# Altium PCB Car_reader_pcb.PcbDoc
Units mm, origin at the board's own origin, x right, y up, seen from the top; angles counter-clockwise.
Board outline 152.4 x 101.6 mm, 2 copper layers (Top Layer, Bottom Layer); 64 components, 47 nets, 231 pads, 0 vias.
Unrouted connection lines stored in the file: 122.
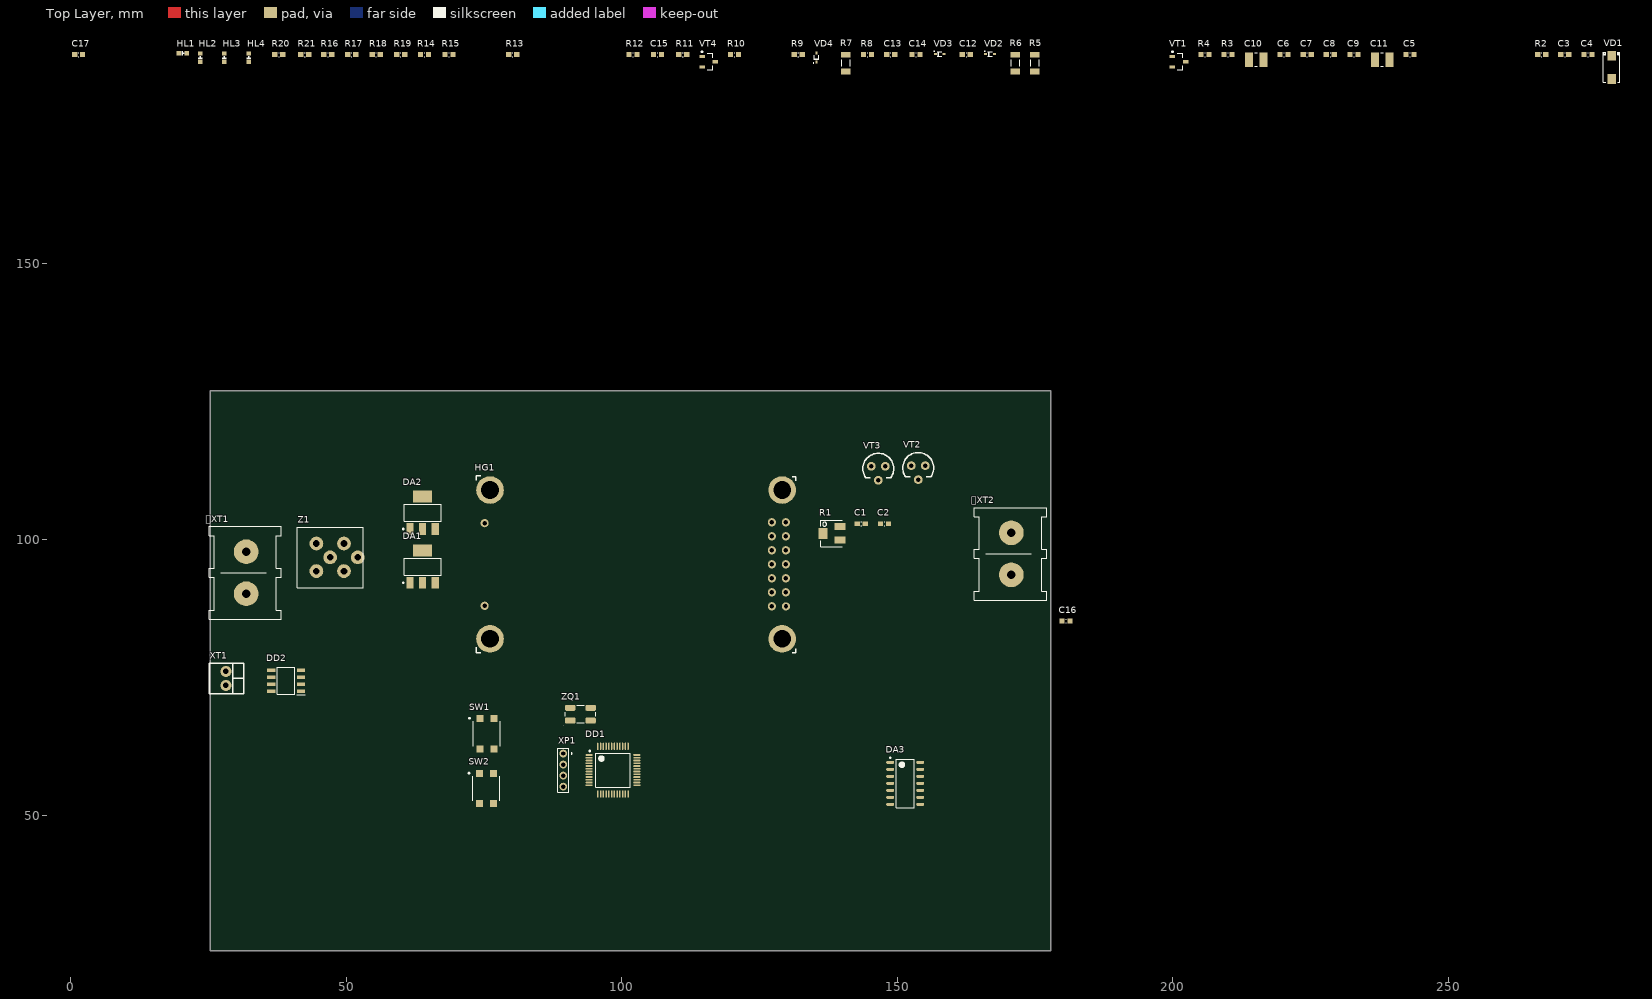
[diagram p0: Top Layer view]
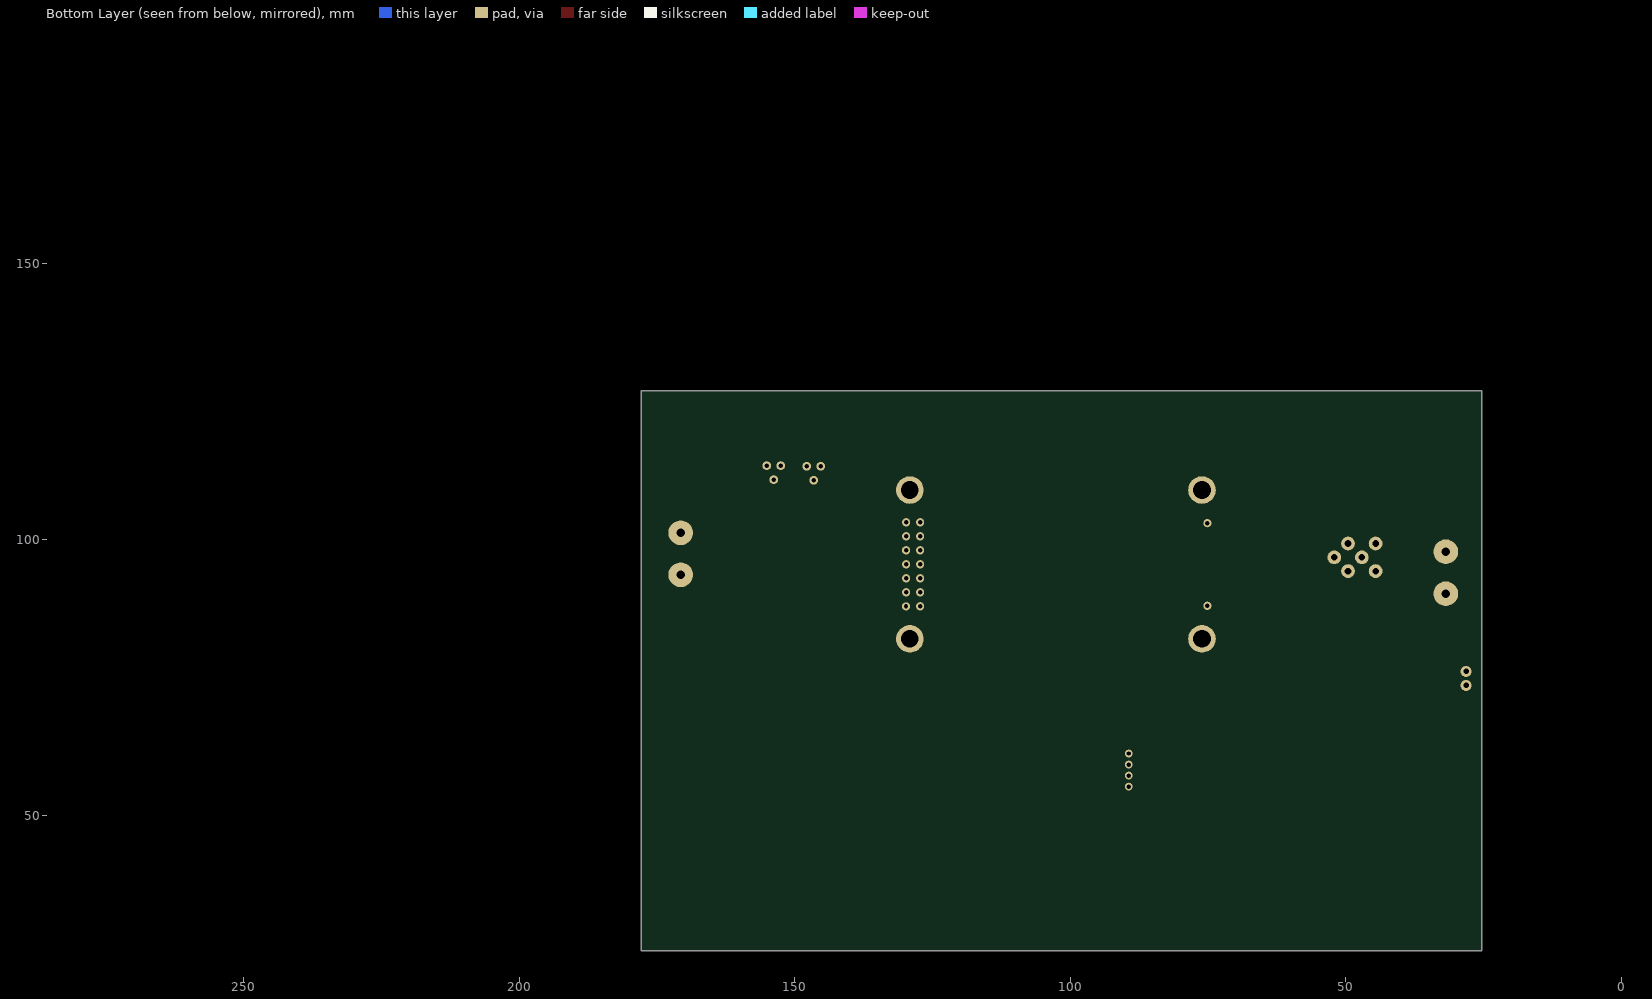
[diagram p1: Bottom Layer view, seen from below]

## Layer stack, top to bottom
Top Solder: solder mask 0.0102, Solder Resist, Dk 3.5
Top Layer: signal copper 0.0356
Dielectric 1: dielectric 0.32, FR-4, Dk 4.8
Bottom Layer: signal copper 0.0356
Bottom Solder: solder mask 0.0102, Solder Resist, Dk 3.5

## Board outline
25.4,25.4 177.8,25.4 177.8,127 25.4,127

## Design rules (kind name [scope] priority, off if disabled: settings)
Clearance [All] p1: gap=0.254 ignorepadtopadclearanceinfootprint=FALSE except(0: Arc-Hole Track-Hole SMDPad-Hole THPad-Hole Via-Hole Fill-Hole Poly-Hole Region-Hole Text-Hole)
PolygonConnect [All] p1: connectstyle=Relief reliefconductorwidth=0.254 reliefentries=4 polygonreliefangle="90 Angle" airgapwidth=0.254
RoutingVias [All] p1: holewidth=0.711 width=1.27 viastyle="Through Hole" minholewidth=0.711 minwidth=1.27 maxholewidth=0.711 maxwidth=1.27
SolderMaskExpansion [All] p1: expansion=0.102 istentingtop=FALSE
Width [All] p1: maxlimit=0.254 minlimit=0.254 preferedwidth=0.254
30 further rules are at their usual default settings.

## Components (designator, comment, footprint, x,y, rotation, side; value= is the part's Value field where it differs from the comment)
XT1 "DG25C-B-02P" DG25C-B-02P 31.877,90.17 r90 top (schematic designator XT1)
XT2 "DG25C-B-02P" DG25C-B-02P 170.688,93.599 r90 top (schematic designator XT2)
C1 "0,1 мк" C_0603 143.469,102.87 r0 top value=0.1µF
C2 "0,1 мк" C_0603 147.66,102.87 r0 top value=0.1µF
C3 "0,1 мк" C_0603 271.104,187.96 r0 top value=0.1µF
C4 "0,1 мк" C_0603 275.295,187.96 r0 top value=0.1µF
C5 "0,1 мк" C_0603 243.037,187.96 r0 top value=0.1µF
C6 "0,1 мк" C_0603 220.177,187.96 r0 top value=0.1µF
C7 "0,1 мк" C_0603 224.368,187.96 r0 top value=0.1µF
C8 "0,1 мк" C_0603 228.559,187.96 r0 top value=0.1µF
C9 "0,1 мк" C_0603 232.877,187.96 r0 top value=0.1µF
C10 "22 мк" C_1210 215.097,187.071 r0 top
C11 "22 мк" C_1210 237.957,187.071 r0 top
C12 "0,001" C_0603 162.519,187.96 r0 top value=0.1µF
C13 "1000" C_0603 148.803,187.96 r0 top value=0.1µF
C14 "1000" C_0603 153.375,187.96 r0 top value=0.1µF
C15 "0,1 мк" C_0603 106.512,187.96 r0 top value=0.1µF
C16 "0,1 мк" C_0603 180.594,85.217 r0 top value=0.1µF
C17 "0,1 мк" C_0603 1.483,187.96 r0 top value=0.1µF
DA1 "LM1117MPX-5.0" sot223 63.881,95.082 r90 top
DA2 "LM1117GS-2.5" SOT223 63.881,104.861 r90 top
DA3 "AD8608ARZ" SO-14 151.442,55.753 r0 top
DD1 "STM32F030C8T6" LQFP48 98.425,58.166 r0 top
DD2 "MCP2551T-I_SN" SOIC127P600X175-8N 39.116,74.422 r180 top
HG1 "ERM802-3" ERM802 131.622,111.406 r180 top
HL1 "BL-HGK36G" LED_0603_GREEN 20.406,188.214 r0 top
HL2 "BL-HGK36G" LED_0603_GREEN 23.581,187.452 r90 top
HL3 "BL-HKC36A-AV" LED_0603_GREEN 27.899,187.452 r90 top
HL4 "BL-HJD36A-AV" LED_0603_RED 32.344,187.452 r90 top
R1 "3214W-1-103E" "3214W Bourns" 138.008,101.092 r0 top
R2 "100k" R_0603 266.913,187.96 r0 top value=82
R3 "470" R_0603 210.017,187.96 r0 top value=82
R4 "1 кОм" R_0603 205.826,187.96 r0 top
R5 "10" R_1206 174.965,186.436 r90 top
R6 "10" R_1206 171.409,186.436 r90 top
R7 "10" R_1206 140.675,186.436 r90 top
R8 "820к" R_0603 144.612,187.96 r0 top value=82
R9 "22k" R_0603 132.039,187.96 r0 top value=82
R10 "100" R_0603 120.482,187.96 r0 top value=82
R11 "12K" R_0603 111.084,187.96 r0 top value=82
R12 "10k" R_0603 102.067,187.96 r0 top value=82
R13 "120" R_0603 80.223,187.96 r0 top value="1 кОм"
R14 "10 кОм" R_0603 64.221,187.96 r0 top
R15 "10 кОм" R_0603 68.666,187.96 r0 top
R16 "470" R_0603 46.695,187.96 r0 top
R17 "470" R_0603 51.013,187.96 r0 top
R18 "470" R_0603 55.458,187.96 r0 top
R19 "470" R_0603 59.903,187.96 r0 top
R20 "1кОм" R_0603 37.805,187.96 r0 top value="10 кОм"
R21 "1кОм" R_0603 42.504,187.96 r0 top value="10 кОм"
SW1 "7914G-1-000E" 7914G 75.524,64.77 r0 top
SW2 "7914G-1-000E" 7914G 75.438,54.82 r0 top
VD1 "SMAJ12A-TR" DO-214AC 279.613,185.674 r90 top
VD2 "1N4148WT" SOD-523F 166.837,188.087 r0 top
VD3 "1N4148WT" SOD-523F 157.693,188.087 r0 top
VD4 "1N4148WT" SOD-523F 135.341,187.452 r90 top
VT1 "BC847" SOT23 201.127,186.69 r0 top
VT2 "BC547" КТ-26 152.527,113.411 r0 top
VT3 "BC557" КТ-26 145.288,113.284 r0 top
VT4 "BC847" SOT23 115.783,186.69 r0 top
XP1 "PLS2-4" PLS2-4 89.408,61.182 r270 top
XT1 "DG308-2.54-02P" DG308-2.54-02P 28.204,73.533 r90 top
Z1 "BNX016-01" BNX01 47.117,96.774 r0 top
ZQ1 "8 МГц" "MJ CRYSTAL" 90.678,67.169 r0 top

## Footprints (in the part's own frame and the unit in brackets; to place one, negate y for a bottom-side part, rotate by r counter-clockwise, add the part's x,y. Pads: shape width x height; smd on the part's side, far side on the other; paste and mask are expansions set on the pad)
"3214W Bourns" [mm]
  rect 2x1.3 smd: 1(1.6,-1.2) 3(1.6,1.3)
  rect 1.6x2 smd: 2(-1.5,0)
  silkscreen extent -1.9,-2.4 2,2.4, body extent -1.87,-2.4 2.07,2.4, height 5.5
7914G [mm]
  rect 1.27x1.27 smd paste+0 mask+0: 1(-1.27,-2.75) 1(-1.27,2.75) 2(1.27,-2.75) 2(1.27,2.75)
  silkscreen extent -3.25,-2.25 2.46,2.94, body extent -2.46,-3.1 2.46,3.1, height 4.54
BNX01 [mm]
  round 2.5 hole 1.2: 1(2.5,-2.5) 2(2.5,2.5) 3(-2.5,2.5) 4(-2.5,-2.5) 4(0,0) 4(5,0)
  silkscreen extent -6,-5.5 6,5.5, body extent -6,-5.5 6,5.5, height 8
C_0603 [mm] "Chip Resistor, 2-Leads, Body 1.60x0.80mm, IPC Medium Density"
  rect 0.95x0.9 smd: 1(-0.725,0) 2(0.725,0)
  silkscreen extent -0.05,-0.35 0.05,0.35, body extent -0.8,-0.4 0.8,0.4, height 0.8
C_1210 [mm] "Chip Capacitor, 2-Leads, Body 3.20x2.50mm, IPC Medium Density"
  rect 1.45x2.65 smd: 1(-1.325,0) 2(1.325,0)
  silkscreen extent -0.2,-1.22 0.2,1.23, body extent -1.6,-1.25 1.6,1.25, height 2.5
DG25C-B-02P [mm]
  round 4.5 hole 1.6: 1(0,0) 2(7.62,0)
  silkscreen extent -4.6,-6.4 12.2,6.7, body extent -4.57,-6.48 12.17,6.75, height 15
DG308-2.54-02P [mm]
  round 2 hole 1: 1(0,0) 2(2.54,0)
  silkscreen extent -1.5,-3.2 4,3, body extent -1.65,-3 4.15,3.03, height 7.93
DO-214AC [mm]
  rect 1.8x1.5 smd: 1(-2.1,0) 2(2.1,0)
  silkscreen extent -2.7,-1.5 2.7,1.5, body extent -2.5,-1.35 2.5,1.35, height 2.25
ERM802 [mm]
  round 5 hole 3.2: 0(2.508,29.428) 0(2.508,2.428) 0(55.508,2.428) 0(55.508,29.428)
  round 1.5 hole 0.8: 1(4.368,8.282) 2(1.828,8.282) 3(4.368,10.822) 4(1.828,10.822) 5(4.368,13.362) 6(1.821,13.362) 7(4.368,15.902) 8(1.828,15.902) 9(4.368,18.442) 10(1.828,18.442) 11(4.368,20.982) 12(1.828,20.982) 13(4.368,23.522) 14(1.814,23.535) 15(56.488,23.428) 16(56.488,8.428)
  silkscreen extent 0.01,-0.15 58.02,31.9, body extent -0.47,-0.37 58.47,32.16, height 18.2
LED_0603_GREEN [mm]
  rect 0.8x0.8 smd: 1(-0.775,0) 2(0.725,0)
  silkscreen extent -0.3,-0.4 0.25,0.4, body extent -0.8,-0.4 0.8,0.4, height 0.6
LED_0603_RED [mm]
  rect 0.8x0.8 smd: 1(-0.775,0) 2(0.725,0)
  silkscreen extent -0.3,-0.4 0.25,0.4, body extent -0.8,-0.4 0.8,0.4, height 0.65
LQFP48 [mm] "TSQFP, 48-Leads, Body 7,00x7,00mm, Pitch 0,50mm, IPC Medium Density"
  oval 1.3x0.3 smd: 1(-4.325,2.75) 2(-4.325,2.25) 3(-4.325,1.75) 4(-4.325,1.25) 5(-4.325,0.75) 6(-4.325,0.25) 7(-4.325,-0.25) 8(-4.325,-0.75) 9(-4.325,-1.25) 10(-4.325,-1.75) 11(-4.325,-2.25) 12(-4.325,-2.75) 25(4.325,-2.75) 26(4.325,-2.25) 27(4.325,-1.75) 28(4.325,-1.25) 29(4.325,-0.75) 30(4.325,-0.25) 31(4.325,0.25) 32(4.325,0.75) 33(4.325,1.25) 34(4.325,1.75) 35(4.325,2.25) 36(4.325,2.75)
  oval 0.3x1.3 smd: 13(-2.75,-4.325) 14(-2.25,-4.325) 15(-1.75,-4.325) 16(-1.25,-4.325) 17(-0.75,-4.325) 18(-0.25,-4.325) 19(0.25,-4.325) 20(0.75,-4.325) 21(1.25,-4.325) 22(1.75,-4.325) 23(2.25,-4.325) 24(2.75,-4.325) 37(2.75,4.325) 38(2.25,4.325) 39(1.75,4.325) 40(1.25,4.325) 41(0.75,4.325) 42(0.25,4.325) 43(-0.25,4.325) 44(-0.75,4.325) 45(-1.25,4.325) 46(-1.75,4.325) 47(-2.25,4.325) 48(-2.75,4.325)
  silkscreen extent -4.35,-3.1 3.1,3.57, body extent -4.53,-4.53 4.47,4.47, height 1.5
"MJ CRYSTAL" [mm]
  rrect50% 1.9x1.1 smd: 1(0,0) 2(3.7,0) 3(3.7,2.3) 4(0,2.3)
  silkscreen extent -0.9,-0.4 4.6,2.8, body extent -0.67,-0.46 4.33,2.74, height 1
PLS2-4 [mm]
  round 1.4 hole 0.8: 1(0,0) 2(2,0) 3(4,0) 4(6,0)
  silkscreen extent -1,-1 7,1.6, body extent -1,-1 7,1, height 6.1
R_0603 [mm] "Chip Resistor, 2-Leads, Body 1.60x0.80mm, IPC Medium Density"
  rect 0.95x0.9 smd: 1(-0.725,0) 2(0.725,0)
  silkscreen extent -0.05,-0.38 0.05,0.38, body extent -0.8,-0.45 0.75,0.4, height 0.45
R_1206 [mm] "Chip Capacitor, 2-Leads, Body 3,20x1,60mm, IPC Medium Density"
  rect 1.05x1.75 smd: 1(-1.5,0) 2(1.5,0)
  silkscreen extent -0.6,-0.77 0.6,0.77, body extent -1.68,-0.87 1.67,0.86, height 0.85
SO-14 [mm] "SOIC, 14-Leads, Body 8,65x3,90mm, Pitch 1,27mm, IPC Medium Density"
  oval 1.45x0.6 smd: 1(-2.725,3.81) 2(-2.725,2.54) 3(-2.725,1.27) 4(-2.725,0) 5(-2.725,-1.27) 6(-2.725,-2.54) 7(-2.725,-3.81) 8(2.725,-3.81) 9(2.725,-2.54) 10(2.725,-1.27) 11(2.725,0) 12(2.725,1.27) 13(2.725,2.54) 14(2.725,3.81)
  silkscreen extent -2.85,-4.4 1.6,4.78, body extent -2.99,-4.34 3,4.35, height 1.6
SOD-523F [mm] "SODFL, 2-Leads, Body 0.80x1.60mm, IPC Medium Density"
  rect 0.55x0.4 smd: 1(-0.8,0) 2(0.8,0)
  silkscreen extent -1.02,-0.42 0.4,0.55, body extent -0.8,-0.45 0.8,0.45, height 0.7
SOIC127P600X175-8N [mm]
  rect 1.525x0.65 smd: 1(-2.712,1.905) 2(-2.712,0.635) 3(-2.712,-0.635) 4(-2.712,-1.905) 5(2.712,-1.905) 6(2.712,-0.635) 7(2.712,0.635) 8(2.712,1.905)
  silkscreen extent -3.47,-2.45 1.6,2.58, body extent -3,-2.45 3,2.45, height 1.75
SOT23 [mm] "SOT23, 3-Leads, Body 2,90x2,45mm, Pitch 0,95mm, IPC Medium Density"
  rect 1x0.6 smd: 1(-1.2,0.95) 2(-1.2,-0.95) 3(1.2,0)
  silkscreen extent -1.32,-1.5 0.7,1.92, body extent -1.05,-1.5 1.45,1.5, height 1.05
sot223 [mm] "SOT223, 4-Leads, Body 6,50x7,00mm (avg), Pitch 2,30mm, IPC Medium Density"
  rect 2.15x1.3 smd: 1(-2.925,2.3) 2(-2.925,0) 3(-2.925,-2.3)
  rect 2.15x3.5 smd: 2(2.925,0)
  silkscreen extent -3.05,-3.35 1.55,3.62, body extent -3.5,-3.25 3.5,3.25, height 1.69
SOT223 [mm] "SOT223, 4-Leads, Body 6,50x7,00mm (avg), Pitch 2,30mm, IPC Medium Density"
  rect 2.15x1.3 smd: 1(-2.925,2.3) 2(-2.925,0) 3(-2.925,-2.3)
  rect 2.15x3.5 smd: 2(2.925,0)
  silkscreen extent -3.05,-3.35 1.55,3.62, body extent -3.5,-3.25 3.5,3.25, height 1.69
КТ-26 [mm] "Аналог TO-92 // Масса не более 1г //  LIV"
  round 1.6 hole 0.8: 1(0,0) 2(1.27,-2.54) 3(2.54,0)
  silkscreen extent -1.53,-2.04 4.07,2.38, body extent -1.33,-2.81 3.87,2.16, height 7.7

## Part data
C1 C2 C3 C4 C5 C6 C7 C8 C9 C12 C13 C14 C15 C16 C17: library part GRM188R72A104KA35D, "CAP CER 0.1UF 100V X7R 0603", Manufacturer="Murata Electronics", Component Type=Capasitor, ComponentLink1Description=Datasheet, ComponentLink1URL=https://www.murata.com/~/media/webrenewal/support/library/catalog/products/capacitor/mlcc/c02e.ashx?la=en-us, Part Number=GRM188R72A104KA35D
C10 C11: library part GRM32ER71E226KE15L
DD1: Manufacturer_Name=STMicroelectronics, Mouser Part Number=511-STM32F030C8T6, Arrow Part Number=STM32F030C8T6, Arrow Price/Stock=https://www.arrow.com/en/products/stm32f030c8t6/stmicroelectronics?region=nac, Datasheet Link=http://www.st.com/web/en/resource/technical/document/datasheet/DM00088500.pdf, Height=1.6mm, Manufacturer_Part_Number=STM32F030C8T6, Mouser Price/Stock=https://www.mouser.co.uk/ProductDetail/STMicroelectronics/STM32F030C8T6?qs=eyrSuY1LhL02NUjnPm0S4A%3D%3D
HL1 HL2: "SMD LED 0603 TOP зеленый"
HL3: "SMD LED 0603 TOP желтый"
HL4: "SMD LED 0603 TOP красный"
R2 R3 R8 R9 R10 R11 R12: library part CR0603-FX-82R0ELF, "RES SMD 82 OHM 1% 1/10W 0603", Manufacturer="Bourns Inc.", Component Type=Resistor, ComponentLink1Description=Datasheet, ComponentLink1URL=https://www.bourns.com/pdfs/chpreztr.pdf, Part Number=CR0603-FX-82R0ELF
R4 R13: library part CR0603-FX-1001ELF, "RES SMD 1K OHM 1% 1/10W 0603", Manufacturer="Bourns Inc.", Component Type=Resistor, ComponentLink1Description=Datasheet, ComponentLink1URL=https://www.bourns.com/pdfs/chpreztr.pdf, Part Number=CR0603-FX-1001ELF
R5 R6 R7: library part R_1206
R14 R15 R20 R21: library part CR0603-FX-1002ELF, "RES SMD 10K OHM 1% 1/10W 0603", Manufacturer="Bourns Inc.", Component Type=Resistor, ComponentLink1Description=Datasheet, ComponentLink1URL=https://www.bourns.com/pdfs/chpreztr.pdf, Part Number=CR0603-FX-1002ELF
R16 R17 R18 R19: library part CR0603-FX-4700ELF, "RES SMD 470 OHM 1% 1/10W 0603", Manufacturer="Bourns Inc.", Component Type=Resistor, ComponentLink1Description=Datasheet, ComponentLink1URL=https://www.bourns.com/pdfs/chpreztr.pdf, Part Number=CR0603-FX-4700ELF
SW1 SW2: "Тактовый переключатель SMD"
VD1: "Защитный диод 400Вт 12В"
VD2 VD3 VD4: "Диод"
Z1: "25В 15А 40дБ, LC фильтр"
ZQ1: library part MJ-8.000-12

## Nets (pads, with @x,y where several pads share a name; then routed paths per layer and width w, separated by ;. In a path a pad name is that pad's centre, name@x,y a point inside that pad or via, vN(x,y) a via of type N, cw(c..) or ccw(c..) an arc to the next point about the centre after c; other vN are vias at no path point)
2V5: C9.2 C11.2 DA2.2
3V3: C1.2 C2.2 C3.2 C4.2 DD1.1 DD1.9 DD1.24 DD1.48 R2.1 R14.2 R15.2 R16.2
5V0: C7.2 C10.1 C15.2 DA1.2 DD2.3 HG1.2 HG1.15 R1.1 R17.2
12V: C6.2 C8.2 DA1.3 DA2.3 R3.1 R9.2 VD1.2 VT2.1 Z1.1
B1: C16.2 R20.1
B2: C17.2 R21.1
CAN_H: DD2.7 R13.2 XT1.1
CAN_L: DD2.6 R13.1 XT1.2
CAN_RX: DD2.4
CAN_TX: DD2.1
ENABLE_LED: R18.2
FAULT_LED: R19.2
GND: C1.1 C2.1 C3.1 C4.1 C5.1 C6.1 C7.1 C8.1 C9.1 C10.2 C11.1 C13.1 C14.1 C15.1 C16.1 C17.1 DA1.1 DA2.1 DD1.8 DD1.23 DD1.47 DD2.2 HG1.1 HG1.5 HL1.2 HL2.2 HL3.2 HL4.2 R1.3 R8.1 R11.2 R12.2 SW1.1 SW2.1 VD1.1 VT1.2 VT3.1 VT4.2 XP1.4 Z1.4 ZQ1.2 ZQ1.4
LCD_A0: HG1.4
LCD_BL_CTRL: R4.2
LCD_DB4: HG1.11
LCD_DB5: HG1.12
LCD_DB6: HG1.13
LCD_DB7: HG1.14
LCD_E: HG1.6
NetXT1_1: XT1.1 Z1.3
NetXT1_2: XT1.2 Z1.2
NetXT2_1: XT2.1 R5.1 R6.1 R7.2
NetXT2_2: XT2.2 C13.2 VD3.2
NetC12_2: C12.2 C14.2 R8.2 VD3.1
NetDD1_5: DD1.5 ZQ1.3
NetDD1_6: DD1.6 ZQ1.1
NetDD2_8: DD2.8 R12.1
NetHG1_3: HG1.3 R1.2
NetHG1_16: HG1.16 VT1.3
NetHL1_1: HL1.1 R16.1
NetHL2_1: HL2.1 R17.1
NetHL3_1: HL3.1 R18.1
NetHL4_1: HL4.1 R19.1
NetR3_2: R3.2 VD2.2 VT2.2
NetR4_1: R4.1 VT1.1
NetR5_2: R5.2 R6.2 VT2.3
NetR7_1: R7.1 VT3.3
NetR9_1: R9.1 R10.1 R11.1
NetR10_2: R10.2 VT4.1
NetR14_1: R14.1 R20.2 SW1.2
NetR15_1: R15.1 R21.2 SW2.2
NetVD2_1: VD2.1 VD4.2
NetVD4_1: VD4.1 VT3.2 VT4.3
NRST: C5.2 DD1.7 R2.2 XP1.3
SWCLK: XP1.1
SWDIO: XP1.2
pads on no net: C12.1 DA3.1 DA3.2 DA3.3 DA3.4 DA3.5 DA3.6 DA3.7 DA3.8 DA3.9 DA3.10 DA3.11 DA3.12 DA3.13 DA3.14 DD1.2 DD1.3 DD1.4 DD1.10 DD1.11 DD1.12 DD1.13 DD1.14 DD1.15 DD1.16 DD1.17 DD1.18 DD1.19 DD1.20 DD1.21 DD1.22 DD1.25 DD1.26 DD1.27 DD1.28 DD1.29 DD1.30 DD1.31 DD1.32 DD1.33 DD1.34 DD1.35 DD1.36 DD1.37 DD1.38 DD1.39 DD1.40 DD1.41 DD1.42 DD1.43 DD1.44 DD1.45 DD1.46 DD2.5 HG1.0 HG1.7 HG1.8 HG1.9 HG1.10